# EAGLE board UD001 - Nick Timer Shield (EAGLE 6.1)
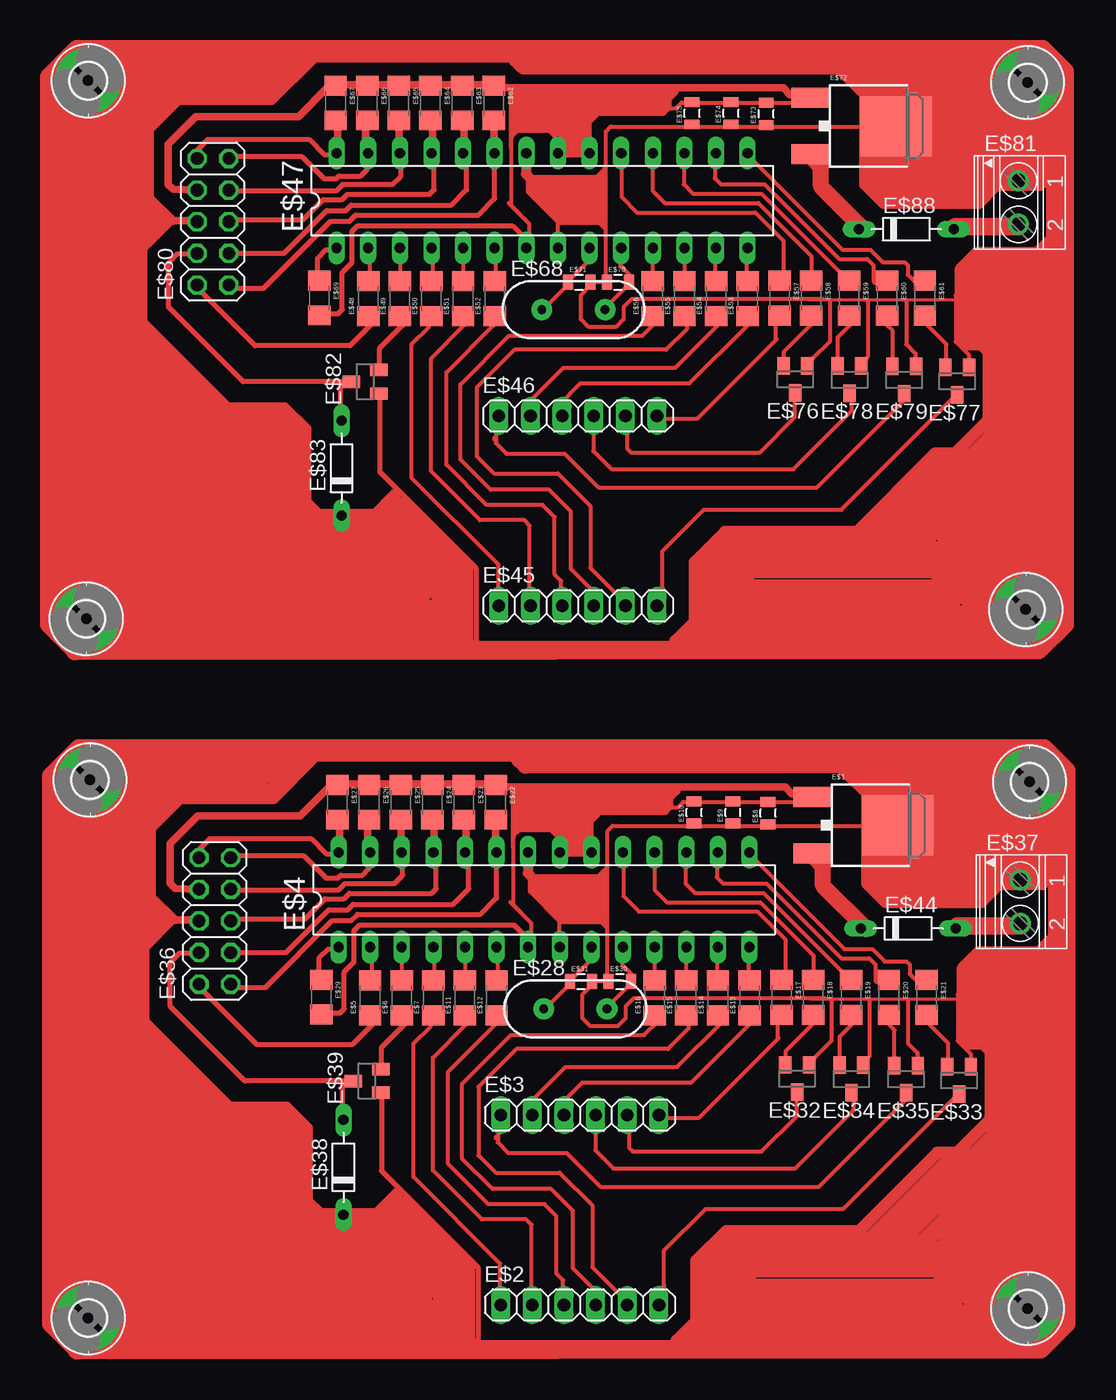
[diagram p0: board, top side]

No outline drawn. Coordinates in mm, seen from the top.
Copper layers (1*16): Top 0.035mm / dielectric 1.5mm / Bottom 0.035mm
Design rules: minimum track width 10mil, minimum drill 24mil, track to track 8mil, track to pad 8mil, pad to pad 8mil, via to via 8mil, smd to smd 8mil, copper to edge 40mil, drill to drill 8mil, minimum pad ring 10mil, minimum via ring 8mil, stop-mask expansion 4mil, vias tented up to drill 0mil, thermal gap 10mil

## Footprints (pad centres in the part's own frame; a part is rotated, then mirrored left to right if it is on the bottom)
DPAK = smd 1.6 x 3: 1 -2.28,-5.31; 3 2.28,-5.31 | smd 4.826 x 5.715: 4 0,1.588
1X06 = drill 1.016 long: 1 -6.35,0; 2 -3.81,0; 3 -1.27,0; 4 1.27,0; 5 3.81,0; 6 6.35,0
DIL28-3 = drill 0.813 long: 1 -16.51,-3.81; 2 -13.97,-3.81; 3 -11.43,-3.81; 4 -8.89,-3.81; 5 -6.35,-3.81; 6 -3.81,-3.81; 7 -1.27,-3.81; 8 1.27,-3.81; 9 3.81,-3.81; 10 6.35,-3.81; 11 8.89,-3.81; 12 11.43,-3.81; 13 13.97,-3.81; 14 16.51,-3.81; 15 16.51,3.81; 16 13.97,3.81; 17 11.43,3.81; 18 8.89,3.81; 19 6.35,3.81; 20 3.81,3.81; 21 1.27,3.81; 22 -1.27,3.81; 23 -3.81,3.81; 24 -6.35,3.81; 25 -8.89,3.81; 26 -11.43,3.81; 27 -13.97,3.81; 28 -16.51,3.81
1206 = smd 1.6 x 1.8: 1 -1.4,0; 2 1.4,0
0805 = smd 0.8 x 1.2: 1 -0.9,0; 2 0.9,0
HC49US = drill 0.7 pad 1.651: 1 -2.54,0; 2 2.54,0
SOT23 = smd 1 x 1.4: 1 -0.95,-1.1; 2 0.95,-1.1; 3 0,1.1
2X05 = drill 1.016 octagon: 1 -5.08,-1.27; 2 -5.08,1.27; 3 -2.54,-1.27; 4 -2.54,1.27; 5 0,-1.27; 6 0,1.27; 7 2.54,-1.27; 8 2.54,1.27; 9 5.08,-1.27; 10 5.08,1.27
1751248 = drill 1.1 pad 1.7: 1 -1.75,-0.1; 2 1.75,-0.1
D-7.5 = drill 0.813 long: A 3.81,0; C -3.81,0
2,8-PAD = drill 2.8 pad 5.334: B2,8 0,0

## Placement (x,y rotation side)
E$1  [DPAK]  71.13,43.65 270 top
E$2  [1X06]  47.17,5.12 0 top
E$3  [1X06]  47.17,20.36 0 top
E$4  [DIL28-3]  44.29,37.67 0 top
E$5  [1206]  30.32,29.8 90 top
E$6  [1206]  32.86,29.8 90 top
E$7  [1206]  35.4,29.8 90 top
E$8  [0805]  62.28,44.63 90 top
E$9  [0805]  59.46,44.68 90 top
E$10  [0805]  56.34,44.68 90 top
E$11  [1206]  37.94,29.8 90 top
E$12  [1206]  40.48,29.8 90 top
E$13  [1206]  60.8,29.8 90 top
E$14  [1206]  58.26,29.8 90 top
E$15  [1206]  55.72,29.8 90 top
E$16  [1206]  53.18,29.8 90 top
E$17  [1206]  63.37,29.83 270 top
E$18  [1206]  65.91,29.83 270 top
E$19  [1206]  68.95,29.83 270 top
E$20  [1206]  71.99,29.83 270 top
E$21  [1206]  75.03,29.83 270 top
E$22  [1206]  40.4,45.5 270 top
E$23  [1206]  37.86,45.5 270 top
E$24  [1206]  35.32,45.5 270 top
E$25  [1206]  32.78,45.5 270 top
E$26  [1206]  30.24,45.5 270 top
E$27  [1206]  27.7,45.5 270 top
E$28  [HC49US]  46.8,28.9 0 top
E$29  [1206]  26.4,29.84 270 top
E$30  [0805]  50.38,31.1 0 top
E$31  [0805]  47.26,31.1 0 top
E$32  [SOT23]  64.62,23.31 180 top
E$33  [SOT23]  77.62,23.16 180 top
E$34  [SOT23]  68.98,23.28 180 top
E$35  [SOT23]  73.37,23.26 180 top
E$36  [2X05]  17.85,35.97 90 top
E$37  [1751248]  82.65,37.51 270 top
E$38  [D-7.5]  28.17,16.17 90 top
E$39  [SOT23]  30.07,23.11 90 top
E$40  [2,8-PAD]  83.14,4.82 0 top
E$41  [2,8-PAD]  83.29,47.14 0 top
E$42  [2,8-PAD]  7.82,47.29 0 top
E$43  [2,8-PAD]  7.67,4.07 0 top
E$44  [D-7.5]  73.54,35.36 0 top
E$45  [1X06]  47.02,61.28 0 top
E$46  [1X06]  47.02,76.52 0 top
E$47  [DIL28-3]  44.14,93.83 0 top
E$48  [1206]  30.17,85.96 90 top
E$49  [1206]  32.71,85.96 90 top
E$50  [1206]  35.25,85.96 90 top
E$51  [1206]  37.79,85.96 90 top
E$52  [1206]  40.33,85.96 90 top
E$53  [1206]  60.65,85.96 90 top
E$54  [1206]  58.11,85.96 90 top
E$55  [1206]  55.57,85.96 90 top
E$56  [1206]  53.03,85.96 90 top
E$57  [1206]  63.22,85.99 270 top
E$58  [1206]  65.76,85.99 270 top
E$59  [1206]  68.8,85.99 270 top
E$60  [1206]  71.84,85.99 270 top
E$61  [1206]  74.88,85.99 270 top
E$62  [1206]  40.25,101.66 270 top
E$63  [1206]  37.71,101.66 270 top
E$64  [1206]  35.17,101.66 270 top
E$65  [1206]  32.63,101.66 270 top
E$66  [1206]  30.09,101.66 270 top
E$67  [1206]  27.55,101.66 270 top
E$68  [HC49US]  46.65,85.06 0 top
E$69  [1206]  26.25,86 270 top
E$70  [0805]  50.23,87.26 0 top
E$71  [0805]  47.11,87.26 0 top
E$72  [DPAK]  70.98,99.81 270 top
E$73  [0805]  62.13,100.79 90 top
E$74  [0805]  59.31,100.84 90 top
E$75  [0805]  56.19,100.84 90 top
E$76  [SOT23]  64.47,79.47 180 top
E$77  [SOT23]  77.47,79.32 180 top
E$78  [SOT23]  68.82,79.44 180 top
E$79  [SOT23]  73.22,79.42 180 top
E$80  [2X05]  17.7,92.13 90 top
E$81  [1751248]  82.5,93.67 270 top
E$82  [SOT23]  29.92,79.27 90 top
E$83  [D-7.5]  28.02,72.33 90 top
E$84  [2,8-PAD]  82.99,60.98 0 top
E$85  [2,8-PAD]  83.14,103.3 0 top
E$86  [2,8-PAD]  7.67,103.45 0 top
E$87  [2,8-PAD]  7.52,60.23 0 top
E$88  [D-7.5]  73.39,91.52 0 top

## Library data of the parts
E$1 E$72 = SparkFun-DiscreteSemi
E$2 E$3 E$36 E$45 E$46 E$80 = pinhead
E$4 E$47 = atmel
E$5-E$27 E$29-E$31 E$48-E$67 E$69-E$71 E$73-E$75 = SparkFun-Passives
E$28 E$68 = SparkFun-FreqCtrl
E$32-E$35 E$39 E$76-E$79 E$82 = led
E$37 E$81 = con-phoenix-350
E$38 E$44 E$83 E$88 = diode
E$40-E$43 E$84-E$87 = holes

## Tracks (layer width: path | path; a pad name or v marks a point on that pad's centre or on a via)
S$1
  Top 0.305: 30.47,31.13 30.47,33.89
S$2
  Top 0.305: 32.86,33.82 32.86,31.42 32.94,31.35
S$3
  Top 0.305: 35.47,33.97 35.47,31.35 35.55,31.28
S$4
  Top 0.305: 37.94,33.97 37.94,30.77 37.87,30.7
S$5
  Top 0.305: 40.55,33.89 40.55,30.77 40.33,30.55
S$6
  Top 0.305: 53.16,33.89 53.16,31.42 52.87,31.13
S$7
  Top 0.305: 55.7,34.04 55.7,31.57 55.41,31.28
S$8
  Top 0.305: 45.55,33.6 45.55,35.93 43.16,38.32 43.16,41.15 43.01,41.3
S$9
  Top 0.305: 43.27,34.07 43.27,35.78 42.82,36.23
S$10
  Top 0.305: 41.78,42.68 41.78,37.28 43.24,35.8
S$11
  Top 0.406: 26.24,31.36 26.24,33.02 26.93,33.72 27.72,33.72
S$12
  Top 1.27: 10.32,49.52 78.97,49.52 78.97,45.24
S$13
  Top 1.27: 78.03,48 68.83,48 67.66,49.16
S$14
  Top 1.27: 68.75,48.73 77.45,48.73 77.74,48.44
S$15
  Top 1.27: 78.25,48.8 78.25,48 78.39,47.85
S$16
  Top 0.61: 40.4,41.1 40.4,43.78 40.55,43.93
S$17
  Top 1.27: 68.82,48.44 42.8,48.44 42.22,49.02
S$18
  Top 0.305: 50.57,33.76 50.57,32.46 51.28,31.75
S$19
  Top 0.305: 48.26,33.84 48.26,33.05 46.37,31.16
S$20
  Top 0.305: 48.38,31.16 49.1,31.16 49.18,31.24
S$21
  Top 0.305: 49.82,43.59 70.16,43.59 70.45,43.88
S$22
  Top 0.406: 53.57,5.07 53.57,6.23 53.92,6.58
S$23
  Top 0.406: 30.46,27.94 30.46,27.62 28.85,26.01 21.23,26.01 16.65,30.59
S$24
  Top 0.406: 28.89,23.11 20.25,23.11 14.28,29.09 14.28,32.66 15.01,33.39 16.37,33.39 16.44,33.46
S$25
  Top 0.406: 28.02,12.4 30.49,12.4 32.45,14.36
S$26
  Top 0.305: 58.17,33.97 58.17,31.06 58.09,30.99
S$27
  Top 0.305: 60.7,33.89 60.7,30.99 60.56,30.84
S$28
  Top 0.305: 50.66,41.21 50.66,37.96 51.91,36.71 61.41,36.71 63.66,34.46 63.66,31.71 63.41,31.46
S$29
  Top 0.305: 41.85,42.69 41.85,42.83 42.31,43.28 44.83,43.28 45.59,42.51 45.59,41.4 45.66,41.33 48.01,41.33 48.22,41.53
S$30
  Top 0.305: 53.16,41.21 53.16,38.46 54.16,37.46 61.66,37.46 65.91,33.21 65.91,31.46
S$31
  Top 0.305: 55.66,41.21 55.66,38.96 56.41,38.21 61.91,38.21 68.41,31.71
S$32
  Top 0.305: 58.16,41.46 58.16,39.46 58.66,38.96 62.16,38.96 68.16,32.96 70.41,32.96 70.91,32.46 70.91,31.21
S$33
  Top 0.305: 37.89,27.91 37.95,27.97
S$34
  Top 0.305: 32.76,28.09 32.94,28.28
S$35
  Top 0.305: 35.53,27.73 35.78,27.97
S$36
  Top 0.305: 53,28.18 52.75,28.43
S$37
  Top 0.305: 63.08,26.49 63.08,27.76
S$38
  Top 0.305: 53.49,20.38 53.4,20.45
S$39
  Top 0.305: 51.12,20.27 51.12,17.75 51.43,17.44 61.76,17.44 64.59,20.27 64.59,21.83 64.69,21.94
S$40
  Top 0.305: 55.77,27.98 55.62,28.13
S$41
  Top 0.305: 48.41,20.27 48.41,17.54 49.87,16.08 64.47,16.08 69.18,20.79 69.18,21.62
S$42
  Top 0.305: 40.58,20.47 40.58,18.17 41.41,17.34 46.1,17.34 48.82,14.62 66.35,14.62 73.46,21.73
S$43
  Top 0.305: 53.94,6.67 53.94,9.5 57.28,12.84 68.33,12.84 77.32,21.83
S$44
  Top 1.016: 81.22,49.61 78.72,49.61 78.47,49.37 75.01,49.37
S$45
  Top 0.305: 53.21,20.16 56.75,20.16 63.13,26.54
S$46
  Top 0.305: 49.31,28.81 49.31,28.98 51.28,30.95
S$47
  Top 0.305: 60.91,41.46 60.91,41.21 68.41,33.71 70.66,33.71 71.66,32.71 73.41,32.71 73.66,32.46 73.66,31.71 73.91,31.46
S$48
  Top 0.305: 41.59,37.46 43.23,35.82
S$49
  Top 0.406: 28.1,19.88 28.1,22.78 28.24,22.93
S$50
  Top 0.305: 49.41,31.08 49.41,43.21 49.82,43.62
S$51
  Top 0.305: 49.33,36.74 45.6,36.74 45.53,35.77
S$52
  Top 0.305: 48.13,41.51 48.13,43.98 49.24,45.08 55.03,45.08 55.48,45.54 64.75,45.54 64.95,45.74
S$53
  Top 0.305: 63.71,25.05 63.71,25.52 65.84,27.65
S$54
  Top 0.406: 68.35,27.89 68.45,28
S$55
  Top 0.305: 68.05,25.02 68.05,26.69 69.01,27.65
S$56
  Top 0.254: 65.66,29.71 78.66,29.71
S$57
  Top 0.305: 72.45,25.08 72.45,27.21 71.98,27.68
S$58
  Top 0.305: 44.36,28.89 46.2,30.74
S$59
  Top 0.61: 38.01,41.39 38.01,43.78 37.94,43.86
S$60
  Top 0.61: 35.47,41.17 35.47,43.64 35.62,43.78
S$61
  Top 0.61: 32.79,41.68 32.79,43.64 32.72,43.71
S$62
  Top 0.61: 30.11,41.24 30.11,43.42 30.33,43.64
S$63
  Top 0.61: 65.5,46.18 64.2,46.18 63.66,46.72 41,46.72 40.75,46.97 27.57,46.97 27.49,46.89
S$64
  Top 0.305: 71.7,44.9 71.7,45.32
S$65
  Top 0.61: 28.05,46.8 27.11,46.8 24.71,44.4 16.46,44.4 14.27,42.2 14.27,38.96 14.66,38.56 16.52,38.5
S$66
  Top 0.61: 16.67,36.03 14.69,36.03 12.8,37.91 12.8,43.35 15.1,45.65 22.61,45.65 25.96,49
S$67
  Top 0.61: 27.86,41.53 27.86,43.86 27.93,43.93
S$68
  Top 0.305: 41.79,41.89 41.79,45.5 41.79,46.58
S$69
  Top 0.61: 14.68,36.01 14.48,36.01 12.28,33.81 12.28,27.95 19.07,21.17 23.66,21.17 25.44,19.39 25.44,13.54 26.38,12.6 31.28,12.6 32.64,13.96
S$70
  Top 0.254: 53.98,45.17 53.98,46.29 53.91,46.36
S$71
  Top 0.305: 76.76,24.91 76.76,26.13 75.07,27.82
S$72
  Top 0.813: 53.63,46.19 42.13,46.19 42.13,43.49 42.06,43.42 42.06,43.46 42.62,44.02 42.62,45.66 42.73,45.77 53.49,45.77 53.67,45.94 53.67,45.52 53.56,45.42 48.95,45.42 47.83,44.3 47.83,41.95 47.52,41.64 46.05,41.64 45.98,41.71 45.98,42.72 45.28,43.42 45.28,43.49 44.86,43.91 42.97,43.91 42.8,43.74 44.93,43.74 46.5,42.16 46.96,42.16 47.2,42.41 47.2,44.51 47.97,45.28 43.32,45.28 43.11,45.07 43.11,44.68 46.78,44.68 46.78,42.79 46.71,42.72 46.71,43.04 45.42,44.33 45.88,44.33 45.91,44.3 46.05,44.3 46.33,44.02 46.33,43.81 46.29,43.77
S$73
  Top 0.813: 48.47,44.88 53.97,44.88 54.3,45.21 54.3,45.88 54.85,46.43 54.3,46.43 54.13,46.26
S$74
  Top 0.813: 42.99,41.17 42.99,39.81 43.44,39.36 48.83,39.36 49.09,39.61 49.09,37.39 48.88,37.19 45.46,37.19 45.26,36.99 45.06,36.99 43.7,38.35 43.7,38.65 43.65,38.7 48.43,38.7 48.48,38.75 48.48,38.3 48.43,38.25 44.5,38.25 44.45,38.3 44.45,38 44.8,37.64 48.38,37.64 48.53,37.8
S$75
  Top 0.305: 67.38,29.66 67.38,26.34 66.01,24.97
S$76
  Top 1.422: 73.98,38.66 79.83,38.66 80.46,39.29
S$77
  Top 1.422: 84.34,42.48 83.96,42.85 83.34,43.48
S$78
  Top 1.422: 85.52,34.18 85.09,34.18 84.14,33.24 79.29,33.24 78.13,32.08 78.13,26.63 78.42,26.34 79.65,26.34 80.37,25.61 80.37,19.8 80.16,19.59
S$79
  Top 0.406: 70.98,31.11 72.38,31.11 72.46,31.02
S$80
  Top 0.305: 73.74,31.64 73.74,31.67 73.69,31.72 73.69,31.7 74.39,31
S$81
  Top 0.305: 66.9,29.73 51.46,29.73 50.84,29.1 50.84,28.14 50.21,27.51 48.02,27.51 47.4,28.14 47.4,30.07 48.15,30.82
S$82
  Top 0.305: 45.59,20.58 45.59,21.21 47.36,22.98 56.12,22.98 60.73,27.59
S$83
  Top 0.305: 43.19,20.79 43.19,21.42 46,24.24 54.98,24.24 58.53,27.8
S$84
  Top 1.27: 72.74,47.93 72.74,45.1 72.38,44.74
S$85
  Top 1.422: 81.53,9.35 81.53,32.37 81.9,32.73
S$86
  Top 1.422: 82.48,10.29 82.48,31.79 83.28,32.59
S$87
  Top 1.422: 83.34,10.09 82.59,9.34 82.34,9.34 81.96,8.97
S$88
  Top 1.27: 73.83,38.62 73.83,42.1 74.35,42.62
S$89
  Top 1.27: 70.18,35.31 66.69,38.79 66.69,40.36 66,41.06
S$90
  Top 0.813: 45.27,36.85 45.29,36.65
S$92
  Top 0.813: 48.87,37.16 49.03,37.1
S$93
  Top 0.813: 44.36,38.9 43.55,38.96
S$94
  Top 0.305: 48.31,39.28 48.37,39.28 49.28,40.19
S$95
  Top 0.305: 45.55,35.9 48.85,35.9 49.38,35.36
S$96
  Top 0.305: 49.29,35.65 49.29,36.21 49.09,36.41
S$97
  Top 0.305: 49.09,36.38 49.16,36.38 49.29,36.5
S$98
  Top 0.305: 49.02,36.55 45.84,36.55 45.79,36.5
S$99
  Top 0.305: 45.74,36.36 48.68,36.36 49.14,35.9
S$100
  Top 0.305: 48.92,36.23 48.92,36.33 48.8,36.45
S$101
  Top 0.305: 48.9,36.09 46.01,36.09 45.89,36.21
S$102
  Top 0.305: 45.57,36.11 45.82,36.11
S$103
  Top 0.305: 55.91,28.03 55.91,27.33 54.25,25.68 42.08,25.68 39.03,22.63 39.03,17.14 40.42,15.74 45.55,15.74 48.16,13.13 48.16,8.16 51.03,5.29
S$104
  Top 0.305: 48.25,5.29 48.25,6.42 46.6,8.07 46.6,12.7 44.86,14.44 40.16,14.44 37.72,16.88 37.72,22.9 41.64,26.81 52.34,26.81 53.47,27.95
S$105
  Top 0.305: 45.81,5.2 45.81,7.12 45.29,7.64 45.29,12.26 44.33,13.22 39.81,13.22 36.59,16.44 36.59,23.86 40.42,27.68
S$106
  Top 0.305: 43.29,5.37 43.29,11.56 42.85,12 39.29,12 35.37,15.92 35.37,24.99 38.07,27.68
S$107
  Top 0.305: 40.77,5.11 40.77,8.44 33.81,15.4 33.81,26.12 35.2,27.51
S$108
  Top 1.016: 70.96,49.32 78.4,49.32 78.4,49.65
S$109
  Top 1.016: 78.68,48.98 78.86,48.98 78.86,49.65
S$110
  Top 1.016: 75.05,49.09 76.51,49.09 77.07,49.65
S$111
  Top 0.305: 70.44,29.63 70.44,25.11 70.29,24.97
S$112
  Top 0.305: 73.53,29.6 73.53,26.13 74.28,25.37 74.28,24.7 74.34,24.65
S$113
  Top 0.305: 77.51,30.04 77.51,26.34 78.56,25.29 78.56,24.59 78.62,24.53
S$114
  Top 0.406: 40.47,18.61 40.47,18.51
S$115
  Top 1.016: 81.22,1.79 9.36,1.82
S$116
  Top 1.422: 84.22,32.37 84.22,10 84.65,9.57
S$117
  Top 1.422: 80.35,39.21 82.53,39.21 82.7,39.39
S$118
  Top 1.016: 80.27,49.01 80.18,49.1
S$119
  Top 1.422: 83.71,10 83.71,31.28 84,31.57
S$120
  Top 0.406: 31.24,24.29 31.24,25.8 33.17,27.73
S$121
  Top 0.406: 31.24,22.17 31.24,15.88 38.97,8.15 38.97,2.29 39.27,1.99
S$122
  Top 1.016: 80.77,19.94 80.04,19.94 77.43,17.33 75.87,17.33 69.6,11.05 58.95,11.05 56.55,8.65 56.55,3.84 54.98,2.27 80.04,2.27 80.77,3 80.77,19 80.67,19.11 80.56,19.11 78.06,16.6 76.5,16.6 70.33,10.43 59.58,10.43 56.76,7.6 56.76,3.42 56.23,2.9 79.62,2.9 80.04,3.32 80.04,17.33 80.35,17.64
S$123
  Top 1.422: 57.59,7.18 57.59,3.84 57.7,3.73 78.89,3.73 79.52,4.36 79.52,17.02 78.27,17.02 76.07,14.82 77.32,14.82 78.68,16.18 78.68,4.78 78.37,4.47 76.8,4.47 76.7,4.57 58.53,4.57 58.53,7.08 58.12,7.5 58.12,7.71 60.1,9.7 70.74,9.7 75.44,14.4 77.53,14.4 77.64,14.3 77.64,5.93 77.12,5.41 60.31,5.41 59.89,5.83 59.89,8.23 59.78,8.34 60.2,8.34 60.62,8.75 60.62,7.39 59.05,5.83 59.05,8.34 58.95,8.44 71.05,8.44 76.7,14.09 76.7,9.9 76.28,9.49 76.28,6.77 76.49,6.56 58.22,6.56 57.8,6.14 58.32,6.14 60.2,8.02 76.49,8.02 77.12,8.65 77.12,11.68 76.8,12 76.6,12 73.98,9.38 73.88,9.38 73.67,9.59 76.38,9.59 76.8,9.17 73.57,9.17 72.63,8.23 72.63,8.54 72.31,8.86 73.15,8.86 73.78,9.49
S$124
  Top 0.406: 19.09,30.62 21.91,30.62 27.28,36 28.8,36 29.31,36.51 39.17,36.51 40.48,37.81 40.48,41.15 40.69,41.37
S$125
  Top 0.406: 26.67,28.57 27.89,28.57 28.24,28.92 28.24,31.89 29.02,32.67 29.02,35.2 29.46,35.63 41.9,35.63 43.03,34.5
S$126
  Top 0.406: 19.02,33.46 23.58,33.46 26.99,36.87 28.51,36.87 28.95,37.3 36.99,37.3 38.23,38.54 38.23,40.94 38.01,41.15
S$127
  Top 0.406: 19.23,36.14 25.1,36.14 26.7,37.74 28.22,37.74 28.66,38.18 35.26,38.18 35.62,38.54 35.62,40.79 35.4,41.01
S$128
  Top 0.406: 18.73,38.47 27.79,38.47 28.3,38.98 32.28,38.98 32.94,39.63 32.94,41.37 33.01,41.44
S$129
  Top 0.406: 19.16,41.23 24.96,41.23 26.77,39.41 27.74,39.41 27.96,39.63 29.7,39.63 30.21,40.14 30.21,40.67 30.16,40.72
S$130
  Top 0.406: 16.37,41.19 16.37,41.5 17.46,42.58 25.57,42.58 26.79,41.36 27.73,41.36 27.8,41.43
S$131
  Top 1.422: 38.07,2.15 38.07,7.92 32.85,13.14 32.59,13.14 31.28,11.83 25.89,11.83 24.59,13.14 24.59,18.9 23.11,20.38 18.51,20.38 11.27,27.61 11.27,33.72 13.62,36.07 13.45,36.07 12.06,37.46 12.06,43.4 14.93,46.27 22.32,46.27 25.02,48.97
S$132
  Top 1.422: 23.37,48.36 9.88,48.36
S$133
  Top 1.422: 21.36,47.31 21.8,47.75
S$134
  Top 1.422: 14.06,46.7 13.89,46.7 10.32,43.13
S$135
  Top 1.422: 9.62,2.68 36.85,2.68 37.2,3.03
S$136
  Top 1.422: 32.41,12.1 32.41,11.82 37.03,7.21 37.03,4.08 36.42,3.47
S$137
  Top 1.422: 36.68,3.73 10.49,3.73 10.23,3.99
S$138
  Top 1.422: 12.58,46.88 12.49,46.88 10.75,45.14
S$139
  Top 1.422: 11.36,43.3 11.36,34.76 11.27,34.67
S$140
  Top 1.422: 11.71,36.33 11.71,36.07 12.32,35.46
S$141
  Top 1.422: 10.66,26.48 10.66,26.47 17.71,19.42 22.41,19.42 23.45,18.37 23.45,14.27 23.98,13.75 22.25,13.75 16.67,19.33 17.28,19.33 17.54,19.59 17.61,19.59 22.84,14.36 22.84,16.63 22.58,16.89 21.46,16.89 19.54,18.81 21.97,18.81 22.15,18.63 22.15,17.76 22.5,17.41 22.41,17.41 21.71,18.11
S$142
  Top 1.422: 21.45,14.45 22.32,14.45 26.15,10.61 31.11,10.61 32.07,11.57
S$143
  Top 1.422: 32.33,10.61 32.33,10.43 36.07,6.69 36.07,5.03 35.9,4.86 11.19,4.86 11.19,23.87 11.54,24.21 11.45,24.21 10.93,24.74 10.93,24.46 20.23,15.15 19.12,15.15 11.97,22.3 11.97,5.99 12.14,5.82 34.5,5.82 34.68,5.99 34.68,6.96 31.98,9.65 23.39,9.65 12.84,20.2 14.3,20.2 23.98,10.53 23.98,12.19 22.84,13.32 22.84,12.7 25.45,10.09
S$144
  Top 1.422: 34.07,6.69 13.1,6.69 12.49,7.3 12.49,17.76 13.19,18.46
S$145
  Top 1.422: 12.67,18.9 12.67,18.53 21.45,9.74
S$146
  Top 1.422: 12.93,16.8 12.93,16.53 17.1,12.36
S$147
  Top 1.422: 12.75,15.67 12.75,14.88 15.36,12.27
S$148
  Top 1.422: 12.14,14.97 12.14,13.75 13.88,12.01
S$149
  Top 1.422: 12.06,11.92 19.28,11.92 19.45,11.75
S$150
  Top 1.422: 12.58,11.05 21.97,11.05 22.24,10.79
S$151
  Top 1.422: 14.23,10.44 12.67,10.44 12.32,10.09
S$152
  Top 1.422: 11.36,9.92 23.19,9.92 23.54,9.57
S$153
  Top 1.422: 12.75,8.7 31.98,8.7 32.59,8.09
S$154
  Top 1.422: 13.28,7.48 32.94,7.48
S$155
  Top 1.422: 9.71,49.44 9.71,3.46 9.88,3.29
S$156
  Top 1.422: 10.4,23.52 10.4,47.4 10.58,47.58
S$157
  Top 1.422: 11.1,47.58 20.15,47.58 20.84,48.27
S$158
  Top 1.422: 14.41,46.97 11.28,46.97 10.58,46.27
S$159
  Top 1.422: 16.93,47.49 20.93,47.49 21.11,47.66
S$160
  Top 1.422: 12.98,47.86 11.3,47.86 9.7,49.47 81.02,49.47 81.06,49.51
S$161
  Top 1.422: 22.36,48.1 22.36,47.8 22.73,47.44
S$162
  Top 1.422: 6.76,1.45 84.19,1.51 86.29,3.62 86.29,48.05 84.49,49.85 6.92,49.85 4.66,47.59 4.66,5.95 | 4.66,5.95 4.66,3.62 6.83,1.45 | 4.66,5.95 5.16,5.95 6.67,7.46 8.67,7.46 9.17,6.96
S$163
  Top 1.422: 5.41,45.36 5.41,45.23 6.67,43.98 8.92,43.98 9.3,44.36
S$164
  Top 1.422: 81.46,43.98 85.34,43.98 86.09,44.73
S$165
  Top 1.422: 85.47,43.48 85.47,7.46 85.34,7.33 82.21,7.33 81.46,8.09 83.84,8.09 84.34,8.59
S$166
  Top 1.422: 83.59,10.47 83.59,8.59 83.46,8.46
S$167
  Top 1.422: 8.8,8.09 8.8,43.86 7.92,44.73
S$168
  Top 1.422: 7.79,43.35 7.79,9.09 6.79,8.09
S$169
  Top 1.422: 6.67,8.21 6.67,43.23 7.54,44.11
S$170
  Top 1.422: 5.66,44.36 5.66,7.71 5.41,7.46
S$171
  Top 1.422: 81.17,32.44 80.09,32.44 78.78,31.13
S$172
  Top 1.422: 81.96,44.73 81.83,44.86
S$173
  Top 1.422: 77.48,35.55 82.53,35.55 82.61,35.64
S$174
  Top 1.422: 78.92,28.81 78.92,28.15 80.52,26.56
S$175
  Top 1.422: 80.52,27.28 80.52,31.28 80.74,31.5
S$176
  Top 1.422: 80.23,31.35 80.23,28.88 78.78,27.43
S$177
  Top 1.422: 78.71,28.88 78.71,29.75 79.43,30.48
S$178
  Top 1.422: 79.5,30.12 79.5,29.03 79.58,28.95
S$179
  Top 1.422: 76.87,48.56 76.87,46.03 77.92,44.99 79.48,44.99 81.92,42.55 84.44,42.55 84.7,42.29
S$180
  Top 1.422: 83.05,44.21 81.83,44.21 79.57,46.47 79.57,48.13 80.44,49
S$181
  Top 1.422: 80.53,48.82 80.53,47.52 80.35,47.34
S$182
  Top 1.422: 78,47.52 78,46.38 77.92,46.3
S$183
  Top 0.406: 70.53,45.29 70.53,45.54 68.01,48.06
S$184
  Top 0.406: 69.94,48.57 69.94,38.9 71.62,37.22 79.51,37.22 80.94,38.65 84.38,38.65 85.22,39.49
S$185
  Top 1.27: 69.14,48.02 69.14,47.94 70.53,46.55 76.28,46.55 76.41,46.68 76.41,47.01 76.24,47.18 70.78,47.18 70.74,47.22
S$186
  Top 1.27: 70.53,42.1 70.53,39.15 71.75,37.94 79.05,37.94 79.56,38.44
S$187
  Top 1.27: 71.03,40.29 76.11,40.29 76.49,40.67 76.49,46.13 76.57,46.21
S$188
  Top 1.27: 71.24,39.41 79.43,39.41 80.27,40.25
S$189
  Top 1.27: 72,38.73 73.43,38.73
S$190
  Top 1.27: 71.33,41.17 75.82,41.17 75.82,45.71 74.89,46.63
S$191
  Top 1.27: 76.11,45.37 80.47,45.37 84.47,41.38
S$192
  Top 1.27: 84.84,42.98 84.59,43.23
S$193
  Top 1.27: 84.34,41.05 84.34,39.74 83.96,39.37
S$194
  Top 1.27: 83.71,39.37 82.83,39.37 82.75,39.45
S$195
  Top 1.27: 83.96,40.25 80.6,40.25 80.56,40.2
S$196
  Top 1.27: 84.38,41.38 79.56,41.38 79.05,40.88
S$197
  Top 1.27: 79.97,40.88 79.18,40.88 78.42,40.12
S$198
  Top 1.27: 76.57,39.99 77.16,39.99 78.67,41.51
S$199
  Top 1.27: 76.99,41.13 76.99,41.38 77.75,42.14
S$200
  Top 1.27: 77.08,42.31 81.49,42.31 81.61,42.43
S$201
  Top 1.27: 80.52,42.98 77.29,42.98 77.04,43.23
S$202
  Top 1.27: 77.16,43.99 79.39,43.99 79.43,43.95
S$203
  Top 1.27: 77.83,44.2 77.12,44.2 76.57,44.74
S$204
  Top 1.27: 10.64,24.18 10.64,5.47 10.46,5.29
S$205
  Top 1.27: 8.17,8.68 6.35,8.68 6.05,8.99
S$206
  Top 1.27: 23.46,16.8 22.73,16.8 21.89,15.95
S$207
  Top 1.27: 9.85,5.66 9.6,5.66 8.54,6.72 6.83,6.72 6.78,6.67 6.28,6.67 5.27,5.66 5.27,3.34 5.32,3.29 5.32,2.94 6.58,1.68
S$208
  Top 1.27: 82.37,1.83 81.61,1.83 80.61,2.84 80.61,6.12 81.66,7.17 84.93,7.17 85.99,6.11
S$209
  Top 1.27: 85.94,45.91 85.89,45.91 84.58,44.59
S$210
  Top 1.27: 81.06,44.75 81.06,46.21 80.3,46.97
S$211
  Top 1.27: 6.32,44.8 10.2,44.8 10.25,44.75
S$212
  Top 1.27: 5.27,44.85 5.27,46.16 5.42,46.31
S$213
  Top 0.305: 43.12,90.23 43.12,91.94 42.67,92.39
S$214
  Top 0.305: 45.4,89.76 45.4,92.09 43.01,94.48 43.01,97.31 42.86,97.46
S$215
  Top 0.305: 50.42,89.92 50.42,88.62 51.13,87.91
S$216
  Top 0.305: 48.11,90 48.11,89.21 46.22,87.32
S$217
  Top 0.305: 48.23,87.32 48.95,87.32 49.03,87.4
S$218
  Top 0.305: 49.18,92.9 45.45,92.9 45.38,91.93
S$219
  Top 0.305: 30.32,87.29 30.32,90.05
S$220
  Top 0.305: 32.71,89.98 32.71,87.58 32.79,87.51
S$221
  Top 0.305: 35.32,90.12 35.32,87.51 35.4,87.44
S$222
  Top 0.305: 37.79,90.12 37.79,86.93 37.72,86.86
S$223
  Top 0.305: 40.4,90.05 40.4,86.93 40.18,86.71
S$224
  Top 0.305: 53.01,90.05 53.01,87.58 52.72,87.29
S$225
  Top 0.305: 55.55,90.2 55.55,87.73 55.26,87.44
S$226
  Top 0.305: 58.02,90.12 58.02,87.22 57.94,87.15
S$227
  Top 0.305: 60.55,90.05 60.55,87.15 60.41,87
S$228
  Top 0.305: 32.6,84.25 32.79,84.44
S$229
  Top 0.305: 35.38,83.89 35.63,84.13
S$230
  Top 0.305: 37.74,84.07 37.8,84.13
S$231
  Top 0.305: 52.85,84.34 52.6,84.59
S$232
  Top 0.305: 55.62,84.14 55.47,84.29
S$233
  Top 0.305: 50.51,97.37 50.51,94.12 51.76,92.87 61.26,92.87 63.51,90.62 63.51,87.87 63.26,87.62
S$234
  Top 0.305: 53.01,97.37 53.01,94.62 54.01,93.62 61.51,93.62 65.76,89.37 65.76,87.62
S$235
  Top 0.305: 55.51,97.37 55.51,95.12 56.26,94.37 61.76,94.37 68.26,87.87
S$236
  Top 0.305: 58.01,97.62 58.01,95.62 58.51,95.12 62.01,95.12 68.01,89.12 70.26,89.12 70.76,88.62 70.76,87.37
S$237
  Top 0.305: 60.76,97.62 60.76,97.37 68.26,89.87 70.51,89.87 71.51,88.87 73.26,88.87 73.51,88.62 73.51,87.87 73.76,87.62
S$238
  Top 0.305: 41.63,98.84 41.63,93.44 43.09,91.96
S$239
  Top 0.305: 41.44,93.62 43.08,91.98
S$240
  Top 0.305: 53.34,76.54 53.25,76.61
S$241
  Top 0.305: 41.7,98.85 41.7,98.99 42.16,99.44 44.68,99.44 45.45,98.67 45.45,97.56 45.52,97.48 47.86,97.48 48.07,97.69
S$242
  Top 0.305: 49.26,87.24 49.26,99.37 49.67,99.78
S$243
  Top 0.305: 49.67,99.75 70,99.75 70.3,100.04
S$244
  Top 0.305: 47.98,97.67 47.98,100.14 49.09,101.24 54.88,101.24 55.33,101.7 64.6,101.7 64.8,101.9
S$245
  Top 0.305: 49.16,84.97 49.16,85.14 51.13,87.11
S$246
  Top 0.305: 44.21,85.06 | 44.21,85.06 46.05,86.9
S$247
  Top 0.305: 71.55,101.06 71.55,101.48
S$248
  Top 0.406: 68.2,84.05 68.3,84.16
S$249
  Top 0.406: 40.32,74.78 40.32,74.67
S$250
  Top 1.27: 72.59,104.09 72.59,101.26 72.23,100.9
S$251
  Top 1.27: 73.68,94.78 73.68,98.26 74.2,98.78
S$252
  Top 1.27: 70.03,91.47 66.54,94.95 66.54,96.52 65.85,97.22
S$253
  Top 0.61: 40.25,97.26 40.25,99.94 40.4,100.09
S$254
  Top 0.61: 37.86,97.55 37.86,99.94 37.79,100.02
S$255
  Top 0.61: 35.32,97.33 35.32,99.8 35.47,99.94
S$256
  Top 0.61: 32.64,97.84 32.64,99.8 32.57,99.87
S$257
  Top 0.61: 29.96,97.4 29.96,99.58 30.18,99.8
S$258
  Top 0.61: 27.71,97.69 27.71,100.02 27.78,100.09
S$259
  Top 0.61: 65.36,102.34 64.05,102.34 63.51,102.88 40.85,102.88 40.6,103.13 27.42,103.13 27.34,103.05
S$260
  Top 0.305: 41.64,98.05 41.64,101.66 41.64,102.74
S$261
  Top 0.254: 53.83,101.33 53.83,102.45 53.76,102.52
S$262
  Top 0.813: 53.48,102.34 41.98,102.34 41.98,99.65 41.91,99.58 41.91,99.62 42.47,100.18 42.47,101.82 42.58,101.92 53.34,101.92 53.52,102.1 53.52,101.68 53.41,101.58 48.8,101.58 47.68,100.46 47.68,98.11 47.37,97.8 45.9,97.8 45.83,97.87 45.83,98.88 45.13,99.58 45.13,99.65 44.71,100.07 42.82,100.07 42.65,99.9 44.78,99.9 46.35,98.33 46.81,98.33 47.05,98.57 47.05,100.67 47.82,101.44 43.17,101.44 42.96,101.23 42.96,100.84 46.63,100.84 46.63,98.95 46.56,98.88 46.56,99.2 45.27,100.49 45.72,100.49 45.76,100.46 45.9,100.46 46.18,100.18 46.18,99.97 46.14,99.93
S$263
  Top 0.813: 48.32,101.04 53.82,101.04 54.15,101.37 54.15,102.04 54.7,102.59 54.15,102.59 53.98,102.42
S$264
  Top 0.813: 42.84,97.33 42.84,95.97 43.29,95.52 48.68,95.52 48.94,95.77 48.94,93.55 48.73,93.35 45.31,93.35 45.11,93.15 44.91,93.15 43.55,94.51 43.55,94.81 43.49,94.86 48.28,94.86 48.33,94.91 48.33,94.46 48.28,94.41 44.35,94.41 44.3,94.46 44.3,94.16 44.65,93.8 48.23,93.8 48.38,93.95
S$265
  Top 0.813: 45.12,93.01 45.14,92.81
S$266
  Top 0.813: 48.72,93.32 48.88,93.26
S$267
  Top 0.813: 44.21,95.06 43.41,95.12
S$268
  Top 0.305: 48.16,95.44 48.22,95.44 49.13,96.35
S$269
  Top 0.305: 45.4,92.06 48.7,92.06 49.23,91.52
S$270
  Top 0.305: 49.14,91.81 49.14,92.37 48.94,92.56
S$271
  Top 0.305: 48.94,92.54 49.02,92.54 49.14,92.66
S$272
  Top 0.305: 48.87,92.71 45.69,92.71 45.64,92.66
S$273
  Top 0.305: 45.59,92.52 48.53,92.52 48.99,92.06
S$274
  Top 0.305: 48.77,92.39 48.77,92.49 48.65,92.61
S$275
  Top 0.305: 48.75,92.25 45.86,92.25 45.74,92.37
S$276
  Top 0.305: 45.42,92.27 45.67,92.27
S$277
  Top 1.27: 10.17,105.68 78.82,105.68 78.82,101.4
S$278
  Top 1.27: 77.88,104.16 68.67,104.16 67.51,105.32
S$279
  Top 1.27: 68.6,104.89 77.3,104.89 77.59,104.59
S$280
  Top 1.27: 78.1,104.96 78.1,104.16 78.24,104.02
S$281
  Top 1.27: 68.67,104.59 42.65,104.59 42.07,105.18
S$282
  Top 0.254: 65.51,85.87 78.51,85.87
S$283
  Top 0.406: 70.83,87.27 72.22,87.27 72.31,87.19
S$284
  Top 0.305: 73.59,87.8 73.59,87.83 73.53,87.88 73.53,87.86 74.23,87.16
S$285
  Top 0.305: 66.75,85.89 51.31,85.89 50.68,85.26 50.68,84.3 50.05,83.67 47.88,83.67 47.24,84.3 47.24,86.23 48,86.98
S$286
  Top 0.305: 62.93,82.65 62.93,83.92
S$287
  Top 0.305: 63.56,81.21 63.56,81.68 65.69,83.81
S$288
  Top 0.305: 67.9,81.19 67.9,82.85 68.86,83.81
S$289
  Top 0.305: 72.3,81.24 72.3,83.37 71.83,83.84
S$290
  Top 0.305: 76.61,81.07 76.61,82.29 74.92,83.98
S$291
  Top 0.305: 67.23,85.82 67.23,82.5 65.86,81.13
S$292
  Top 0.305: 70.29,85.79 70.29,81.27 70.14,81.13
S$293
  Top 0.305: 73.38,85.76 73.38,82.29 74.13,81.53 74.13,80.86 74.19,80.81
S$294
  Top 0.305: 77.36,86.19 77.36,82.5 78.41,81.45 78.41,80.75 78.47,80.69
S$295
  Top 0.305: 50.97,76.42 50.97,73.92 51.28,73.6 61.61,73.6 64.44,76.42 64.44,77.99 64.54,78.1
S$296
  Top 0.305: 48.26,76.42 48.26,73.7 49.72,72.24 64.32,72.24 69.03,76.95 69.03,77.78
S$297
  Top 0.305: 40.42,76.64 40.42,74.33 41.26,73.5 45.95,73.5 48.67,70.78 66.2,70.78 73.31,77.89
S$298
  Top 0.305: 53.79,62.83 53.79,65.66 57.13,69 68.18,69 77.17,77.99
S$299
  Top 0.305: 53.06,76.32 56.59,76.32 62.98,82.7
S$300
  Top 0.305: 45.44,76.74 45.44,77.37 47.21,79.14 55.97,79.14 60.57,83.75
S$301
  Top 0.305: 43.03,76.95 43.03,77.58 45.85,80.4 54.83,80.4 58.38,83.96
S$302
  Top 0.305: 55.76,84.19 55.76,83.49 54.1,81.84 41.93,81.84 38.88,78.79 38.88,73.3 40.27,71.9 45.4,71.9 48.01,69.29 48.01,64.32 50.88,61.45
S$303
  Top 0.305: 48.1,61.45 48.1,62.58 46.45,64.23 46.45,68.86 44.7,70.6 40.01,70.6 37.57,73.04 37.57,79.06 41.49,82.97 52.19,82.97 53.32,84.11
S$304
  Top 0.305: 45.66,61.36 45.66,63.28 45.14,63.8 45.14,68.42 44.18,69.38 39.66,69.38 36.44,72.6 36.44,80.02 40.27,83.84
S$305
  Top 0.305: 43.14,61.53 43.14,67.72 42.7,68.16 39.14,68.16 35.22,72.08 35.22,81.15 37.92,83.84
S$306
  Top 0.305: 40.62,61.27 40.62,64.6 33.66,71.56 33.66,82.28 35.05,83.67
S$307
  Top 1.016: 70.81,105.48 78.25,105.48 78.25,105.81
S$308
  Top 1.016: 78.53,105.14 78.7,105.14 78.7,105.81
S$309
  Top 1.016: 74.89,105.25 76.36,105.25 76.92,105.81
S$310
  Top 1.016: 81.07,105.77 78.56,105.77 78.32,105.53 74.86,105.53
S$311
  Top 1.016: 81.07,57.95 9.21,57.98
S$312
  Top 1.016: 80.11,105.17 80.03,105.26
S$313
  Top 0.406: 31.09,80.45 31.09,81.96 33.02,83.89
S$314
  Top 0.406: 31.09,78.33 31.09,72.04 38.82,64.31 38.82,58.45 39.12,58.15
S$315
  Top 1.016: 80.62,76.1 79.89,76.1 77.28,73.49 75.72,73.49 69.45,67.21 58.8,67.21 56.4,64.81 56.4,60 54.83,58.43 79.89,58.43 80.62,59.16 80.62,75.16 80.52,75.27 80.42,75.27 77.91,72.76 76.35,72.76 70.18,66.59 59.43,66.59 56.61,63.76 56.61,59.58 56.09,59.06 79.47,59.06 79.89,59.48 79.89,73.49 80.2,73.8
S$316
  Top 1.422: 57.44,63.34 57.44,60 57.55,59.89 78.74,59.89 79.37,60.52 79.37,73.17 78.12,73.17 75.92,70.98 77.17,70.98 78.53,72.34 78.53,60.94 78.22,60.63 76.65,60.63 76.55,60.73 58.38,60.73 58.38,63.24 57.96,63.66 57.96,63.87 59.95,65.86 70.59,65.86 75.3,70.56 77.38,70.56 77.49,70.46 77.49,62.09 76.97,61.57 60.16,61.57 59.74,61.99 59.74,64.39 59.63,64.5 60.05,64.5 60.47,64.91 60.47,63.55 58.9,61.99 58.9,64.5 58.8,64.6 70.9,64.6 76.55,70.25 76.55,66.06 76.13,65.65 76.13,62.93 76.34,62.72 58.07,62.72 57.65,62.3 58.17,62.3 60.05,64.18 76.34,64.18 76.97,64.81 76.97,67.84 76.65,68.16 76.45,68.16 73.83,65.54 73.73,65.54 73.52,65.75 76.23,65.75 76.65,65.33 73.42,65.33 72.48,64.39 72.48,64.7 72.16,65.02 73,65.02 73.62,65.65
S$317
  Top 0.406: 26.09,87.52 26.09,89.18 26.78,89.88 27.57,89.88
S$318
  Top 0.406: 26.52,84.73 27.74,84.73 28.09,85.08 28.09,88.05 28.87,88.83 28.87,91.36 29.31,91.79 41.74,91.79 42.88,90.66
S$319
  Top 0.406: 18.94,86.78 21.76,86.78 27.13,92.16 28.65,92.16 29.16,92.67 39.02,92.67 40.33,93.97 40.33,97.31 40.54,97.53
S$320
  Top 0.406: 18.87,89.62 23.43,89.62 26.84,93.03 28.36,93.03 28.8,93.47 36.84,93.47 38.08,94.7 38.08,97.1 37.86,97.31
S$321
  Top 0.406: 19.08,92.3 24.95,92.3 26.55,93.9 28.07,93.9 28.51,94.34 35.11,94.34 35.47,94.7 35.47,96.95 35.25,97.17
S$322
  Top 0.406: 18.58,94.63 27.64,94.63 28.15,95.14 32.13,95.14 32.79,95.79 32.79,97.53 32.86,97.6
S$323
  Top 0.406: 19.01,97.39 24.81,97.39 26.62,95.57 27.59,95.57 27.81,95.79 29.55,95.79 30.06,96.3 30.06,96.83 30.02,96.88
S$324
  Top 0.406: 16.22,97.35 16.22,97.66 17.31,98.74 25.41,98.74 26.64,97.52 27.58,97.52 27.65,97.59
S$325
  Top 0.406: 53.42,61.23 53.42,62.39 53.77,62.73
S$326
  Top 0.406: 30.31,84.1 30.31,83.78 28.7,82.17 21.08,82.17 16.5,86.75
S$327
  Top 0.406: 28.74,79.27 20.1,79.27 14.12,85.25 14.12,88.81 14.86,89.55 16.22,89.55 16.29,89.62
S$328
  Top 0.406: 27.87,68.56 30.34,68.56 32.3,70.52
S$329
  Top 0.406: 27.95,76.04 27.95,78.94 28.09,79.09
S$330
  Top 0.61: 27.9,102.96 26.96,102.96 24.56,100.56 16.31,100.56 14.12,98.36 14.12,95.12 14.51,94.72 16.37,94.66
S$331
  Top 0.61: 16.52,92.19 14.54,92.19 12.65,94.08 12.65,99.52 14.95,101.81 22.46,101.81 25.81,105.16
S$332
  Top 0.61: 14.53,92.17 14.33,92.17 12.13,89.97 12.13,84.11 18.92,77.33 23.51,77.33 25.29,75.55 25.29,69.7 26.23,68.76 31.13,68.76 32.49,70.12
S$333
  Top 1.422: 37.92,58.31 37.92,64.08 32.7,69.3 32.44,69.3 31.13,68 25.74,68 24.43,69.3 24.43,75.06 22.95,76.54 18.36,76.54 11.12,83.77 11.12,89.88 13.47,92.23 13.3,92.23 11.91,93.62 11.91,99.56 14.78,102.43 22.17,102.43 24.87,105.13
S$334
  Top 1.422: 23.22,104.52 9.73,104.52
S$335
  Top 1.422: 21.21,103.47 21.65,103.91
S$336
  Top 1.422: 13.91,102.86 13.74,102.86 10.17,99.29
S$337
  Top 1.422: 9.47,58.84 36.7,58.84 37.05,59.19
S$338
  Top 1.422: 32.26,68.26 32.26,67.98 36.88,63.37 36.88,60.23 36.27,59.63
S$339
  Top 1.422: 36.53,59.89 10.34,59.89 10.08,60.15
S$340
  Top 1.422: 12.43,103.04 12.35,103.04 10.6,101.3
S$341
  Top 1.422: 11.21,99.47 11.21,90.92 11.12,90.83
S$342
  Top 1.422: 11.56,92.49 11.56,92.23 12.17,91.62
S$343
  Top 1.422: 10.51,82.64 10.51,82.63 17.56,75.58 22.26,75.58 23.3,74.53 23.3,70.43 23.82,69.91 22.1,69.91 16.52,75.49 17.13,75.49 17.39,75.75 17.46,75.75 22.69,70.52 22.69,72.79 22.43,73.05 21.31,73.05 19.39,74.97 21.82,74.97 22,74.79 22,73.92 22.35,73.57 22.26,73.57 21.56,74.27
S$344
  Top 1.422: 21.3,70.61 22.16,70.61 26,66.77 30.96,66.77 31.92,67.73
S$345
  Top 1.422: 32.18,66.77 32.18,66.59 35.92,62.85 35.92,61.19 35.74,61.02 11.04,61.02 11.04,80.03 11.38,80.37 11.3,80.37 10.78,80.9 10.78,80.62 20.08,71.31 18.97,71.31 11.82,78.46 11.82,62.15 11.99,61.98 34.35,61.98 34.53,62.15 34.53,63.12 31.83,65.81 23.24,65.81 12.69,76.36 14.15,76.36 23.82,66.69 23.82,68.35 22.69,69.48 22.69,68.86 25.3,66.25
S$346
  Top 1.422: 33.92,62.85 12.95,62.85 12.34,63.46 12.34,73.92 13.04,74.62
S$347
  Top 1.422: 12.52,75.06 12.52,74.69 21.3,65.9
S$348
  Top 1.422: 12.78,72.96 12.78,72.69 16.95,68.52
S$349
  Top 1.422: 12.6,71.83 12.6,71.04 15.21,68.43
S$350
  Top 1.422: 11.99,71.13 11.99,69.91 13.73,68.17
S$351
  Top 1.422: 11.91,68.08 19.13,68.08 19.3,67.91
S$352
  Top 1.422: 12.43,67.21 21.82,67.21 22.09,66.95
S$353
  Top 1.422: 14.08,66.6 12.52,66.6 12.17,66.25
S$354
  Top 1.422: 11.21,66.08 23.04,66.08 23.39,65.73
S$355
  Top 1.422: 12.6,64.86 31.83,64.86 32.44,64.25
S$356
  Top 1.422: 13.12,63.64 32.79,63.64
S$357
  Top 1.422: 9.56,105.6 9.56,59.62 9.73,59.45
S$358
  Top 1.422: 10.25,79.68 10.25,103.56 10.43,103.74
S$359
  Top 1.422: 10.95,103.74 20,103.74 20.69,104.43
S$360
  Top 1.422: 14.26,103.13 11.12,103.13 10.43,102.43
S$361
  Top 1.422: 16.78,103.65 20.78,103.65 20.95,103.82
S$362
  Top 1.422: 12.83,104.02 11.15,104.02 9.54,105.63 80.87,105.63 80.91,105.67
S$363
  Top 1.422: 22.21,104.26 22.21,103.96 22.58,103.6
S$364
  Top 1.422: 6.61,57.61 84.04,57.67 86.14,59.78 86.14,104.21 84.34,106.01 6.77,106.01 4.51,103.75 4.51,62.11 | 4.51,62.11 4.51,59.78 6.67,57.61 | 4.51,62.11 5.01,62.11 6.52,63.62 8.52,63.62 9.02,63.12
S$365
  Top 1.422: 5.26,101.52 5.26,101.39 6.52,100.14 8.77,100.14 9.15,100.52
S$366
  Top 1.422: 81.31,100.14 85.19,100.14 85.94,100.89
S$367
  Top 1.422: 81.81,100.89 81.68,101.02
S$368
  Top 1.422: 83.19,66.25 82.44,65.5 82.19,65.5 81.81,65.13
S$369
  Top 1.422: 84.19,98.64 83.81,99.01 83.19,99.64
S$370
  Top 1.422: 85.32,99.64 85.32,63.62 85.19,63.49 82.06,63.49 81.31,64.25 83.69,64.25 84.19,64.75
S$371
  Top 1.422: 83.44,66.63 83.44,64.75 83.31,64.62
S$372
  Top 1.422: 8.65,64.25 8.65,100.02 7.77,100.89
S$373
  Top 1.422: 7.64,99.51 7.64,65.25 6.64,64.25
S$374
  Top 1.422: 6.52,64.37 6.52,99.39 7.39,100.27
S$375
  Top 1.422: 5.51,100.52 5.51,63.87 5.26,63.62
S$376
  Top 1.422: 73.83,94.82 79.68,94.82 80.31,95.45
S$377
  Top 1.422: 80.2,95.37 82.38,95.37 82.55,95.55
S$378
  Top 1.422: 77.33,91.71 82.38,91.71 82.46,91.8
S$379
  Top 1.422: 85.37,90.34 84.94,90.34 84,89.4 79.14,89.4 77.98,88.24 77.98,82.79 78.27,82.5 79.5,82.5 80.22,81.77 80.22,75.97 80.01,75.75
S$380
  Top 1.422: 81.38,65.51 81.38,88.53 81.75,88.89
S$381
  Top 1.422: 82.33,66.45 82.33,87.95 83.12,88.75
S$382
  Top 1.422: 84.07,88.53 84.07,66.16 84.5,65.73
S$383
  Top 1.422: 83.56,66.16 83.56,87.44 83.85,87.73
S$384
  Top 1.422: 81.02,88.6 79.94,88.6 78.63,87.29
S$385
  Top 1.422: 78.77,84.97 78.77,84.31 80.37,82.72
S$386
  Top 1.422: 80.37,83.44 80.37,87.44 80.59,87.66
S$387
  Top 1.422: 80.08,87.51 80.08,85.04 78.63,83.59
S$388
  Top 1.422: 78.56,85.04 78.56,85.91 79.28,86.64
S$389
  Top 1.422: 79.35,86.28 79.35,85.19 79.43,85.11
S$390
  Top 1.422: 76.72,104.72 76.72,102.19 77.77,101.15 79.33,101.15 81.77,98.71 84.29,98.71 84.55,98.45
S$391
  Top 1.422: 82.9,100.37 81.68,100.37 79.42,102.63 79.42,104.29 80.29,105.16
S$392
  Top 1.422: 80.38,104.98 80.38,103.68 80.2,103.5
S$393
  Top 1.422: 77.85,103.68 77.85,102.55 77.77,102.46
S$394
  Top 0.406: 70.38,101.45 70.38,101.7 67.86,104.22
S$395
  Top 0.406: 69.79,104.73 69.79,95.06 71.47,93.38 79.36,93.38 80.79,94.81 84.23,94.81 85.07,95.65
S$396
  Top 1.27: 68.99,104.18 68.99,104.1 70.38,102.71 76.13,102.71 76.26,102.84 76.26,103.17 76.09,103.34 70.63,103.34 70.59,103.38
S$397
  Top 1.27: 70.38,98.26 70.38,95.31 71.6,94.1 78.9,94.1 79.4,94.6
S$398
  Top 1.27: 70.88,96.45 75.96,96.45 76.34,96.83 76.34,102.29 76.42,102.37
S$399
  Top 1.27: 71.09,95.57 79.28,95.57 80.12,96.41
S$400
  Top 1.27: 71.85,94.89 73.28,94.89
S$401
  Top 1.27: 71.18,97.33 75.67,97.33 75.67,101.87 74.75,102.79
S$402
  Top 1.27: 75.96,101.53 80.32,101.53 84.32,97.54
S$403
  Top 1.27: 84.69,99.14 84.44,99.39
S$404
  Top 1.27: 84.19,97.21 84.19,95.9 83.81,95.53
S$405
  Top 1.27: 83.56,95.53 82.68,95.53 82.59,95.61
S$406
  Top 1.27: 83.81,96.41 80.45,96.41 80.41,96.36
S$407
  Top 1.27: 84.23,97.54 79.41,97.54 78.9,97.04
S$408
  Top 1.27: 79.82,97.04 79.03,97.04 78.27,96.28
S$409
  Top 1.27: 76.42,96.16 77.01,96.16 78.52,97.67
S$410
  Top 1.27: 76.84,97.29 76.84,97.54 77.6,98.3
S$411
  Top 1.27: 76.93,98.47 81.33,98.47 81.46,98.59
S$412
  Top 1.27: 80.37,99.14 77.14,99.14 76.89,99.39
S$413
  Top 1.27: 77.01,100.15 79.24,100.15 79.28,100.11
S$414
  Top 1.27: 77.68,100.36 76.97,100.36 76.42,100.9
S$415
  Top 1.27: 10.49,80.34 10.49,61.63 10.31,61.45
S$416
  Top 1.27: 8.02,64.84 6.2,64.84 5.9,65.15
S$417
  Top 1.27: 23.31,72.96 22.58,72.96 21.73,72.11
S$418
  Top 1.27: 9.7,61.82 9.45,61.82 8.39,62.88 6.68,62.88 6.63,62.83 6.12,62.83 5.12,61.82 5.12,59.5 5.17,59.45 5.17,59.09 6.42,57.84
S$419
  Top 1.27: 82.22,57.99 81.46,57.99 80.45,59 80.45,62.28 81.51,63.33 84.78,63.33 85.84,62.27
S$420
  Top 1.27: 85.79,102.07 85.74,102.07 84.43,100.75
S$421
  Top 1.27: 80.91,100.91 80.91,102.37 80.15,103.12
S$422
  Top 1.27: 6.17,100.96 10.05,100.96 10.1,100.91
S$423
  Top 1.27: 5.12,101.01 5.12,102.32 5.27,102.47
(copper drawn outside any net)
  shapes: Top circle x8

## Text on the board
Unrouted: 8888 | 8888